# Altium PCB Stick2.PcbDoc
Units mil, origin at the board's own origin, x right, y up, seen from the top; angles counter-clockwise.
Board outline 2893.7 x 275.59 mil, 2 copper layers (Top Layer, Bottom Layer); 20 components, 30 nets, 66 pads, 22 vias.
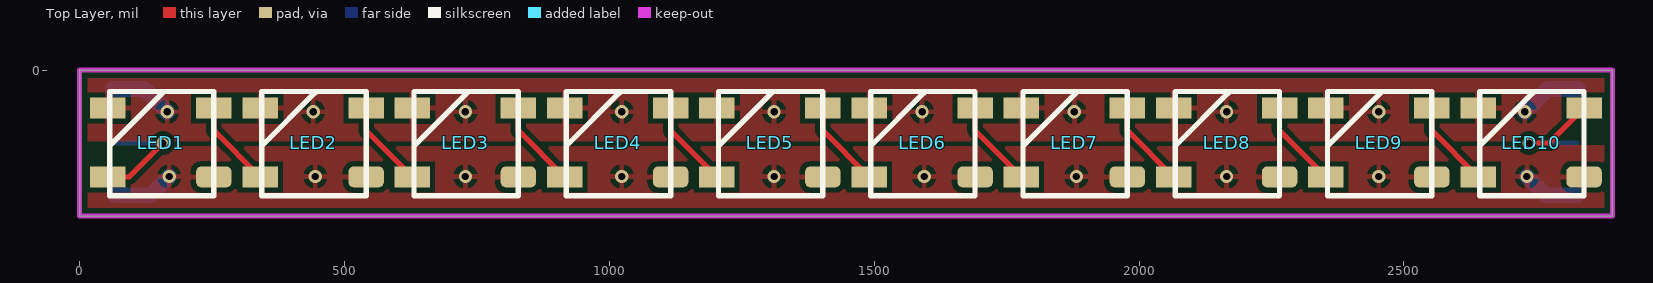
[diagram p0: Top Layer view]
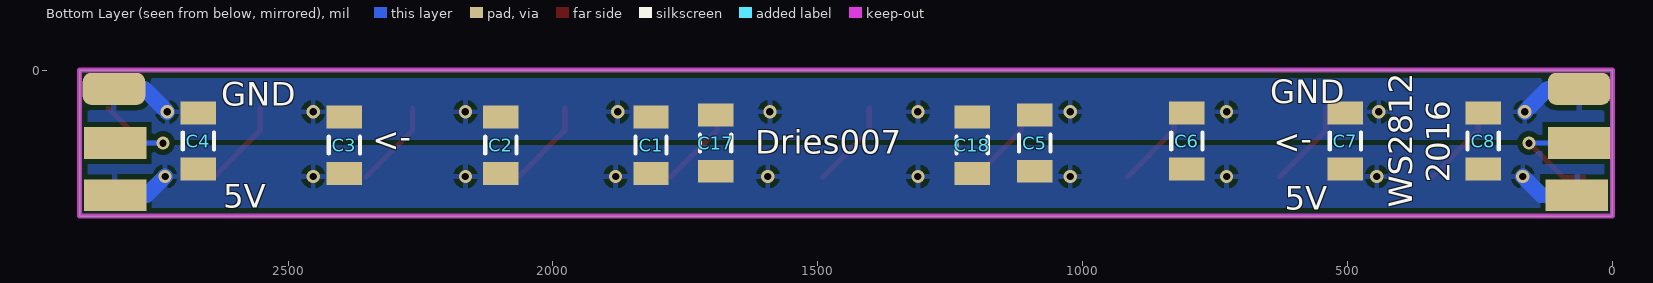
[diagram p1: Bottom Layer view, seen from below]

## Layer stack, top to bottom
Top Solder: solder mask 0.4, Solder Resist, Dk 3.5
Top Layer: signal copper 1.4
Dielectric 1: dielectric 12.6, FR-4, Dk 4.8
Bottom Layer: signal copper 1.4
Bottom Solder: solder mask 0.4, Solder Resist, Dk 3.5

## Board outline
0,-275.59 0,0 2893.7,0 2893.7,-275.59

## Design rules (kind name [scope] priority, off if disabled: settings)
Clearance [All] p1: gap=10
PolygonConnect [All] p1: connectstyle=Relief reliefconductorwidth=10 reliefentries=4 polygonreliefangle="90 Angle" airgapwidth=10
RoutingVias [All] p1: holewidth=28 width=50 viastyle="Through Hole" minholewidth=14 minwidth=25 maxholewidth=28 maxwidth=50
SolderMaskExpansion [All] p1: expansion=4
Width [All] p1: maxlimit=60 minlimit=10 preferedwidth=10
30 further rules are at their usual default settings.

## Classes and differential pairs
component class Stick: C1 C2 C3 C4 C5 C6 C7 C8 LED1 LED2 LED3 LED4 LED5 LED6 LED7 LED8
component class Rect: C17 C18 LED9 LED10

## Components (designator, comment, footprint, x,y, rotation, side; value= is the part's Value field where it differs from the comment)
C1 "" C1206 1814.96,-141.73 r270 bottom
C2 "" C1206 2098.43,-141.73 r270 bottom
C3 "" C1206 2393.7,-141.73 r270 bottom
C4 "" C1206 2669.29,-133.86 r270 bottom
C5 "" C1206 1090.55,-137.8 r270 bottom
C6 "" C1206 803.15,-133.86 r270 bottom
C7 "" C1206 503.94,-133.86 r270 bottom
C8 "" C1206 244.09,-133.86 r270 bottom
C17 "" C1206 1692.91,-137.8 r270 bottom
C18 "" C1206 1208.66,-141.73 r270 bottom
LED1 "WS2812B" WS2812B 153.54,-141.73 r180 top
LED2 "WS2812B" WS2812B 440.94,-141.73 r180 top
LED3 "WS2812B" WS2812B 728.35,-141.73 r180 top
LED4 "WS2812B" WS2812B 1015.75,-141.73 r180 top
LED5 "WS2812B" WS2812B 1303.15,-141.73 r180 top
LED6 "WS2812B" WS2812B 1590.55,-141.73 r180 top
LED7 "WS2812B" WS2812B 1877.95,-141.73 r180 top
LED8 "WS2812B" WS2812B 2165.35,-141.73 r180 top
LED9 "WS2812B" WS2812B 2452.76,-141.73 r180 top
LED10 "WS2812B" WS2812B 2740.16,-141.73 r180 top

## Footprints (in the part's own frame and the unit in brackets; to place one, negate y for a bottom-side part, rotate by r counter-clockwise, add the part's x,y. Pads: shape width x height; smd on the part's side, far side on the other; paste and mask are expansions set on the pad)
C1206 [mm] "Chip Capacitor, Body 3.2x1.6mm, IPC High Density"
  rect 1.1x1.7 smd: 1(-1.35,0) 2(1.35,0)
  silkscreen extent -0.4,-0.75 0.4,0.75, body extent -1.7,-0.9 1.7,0.9, height 1.3
WS2812B [mm]
  rrect50% 1.7x1 smd: 1(-2.54,1.524)
  rect 1.7x1 smd: 2(-2.54,-1.778) 3(2.54,-1.778) 4(2.54,1.524)
  silkscreen extent -2.54,-2.58 2.46,2.42

## Part data
C1 C2 C3 C4 C5 C6 C7 C8 C17 C18: library part Cap, "Capacitor"

## Free pads (board coordinates)
  rrect50% 118.11x60 smd far side: 0(62.99,-35.43) 0(2828.74,-35.43)
  rect 118.11x60 smd far side: 1(62.99,-137.8) 1(2826.77,-137.8) 2(66.93,-236.22) 2(2826.77,-236.22)

## Via types
v1: diameter 25, hole 14, Top Layer to Bottom Layer, tented both sides, 22 vias

## Nets (pads, with @x,y where several pads share a name; then routed paths per layer and width w, separated by ;. In a path a pad name is that pad's centre, name@x,y a point inside that pad or via, vN(x,y) a via of type N, cw(c..) or ccw(c..) an arc to the next point about the centre after c; other vN are vias at no path point)
DIN: LED1.4 pad.1@62.99,-137.8 | length 224.9
  Top Layer w10: LED1.4 93.54,-201.73 v1(157.48,-137.8)
  Bottom Layer w10: pad.1@62.99,-137.8 v1(157.48,-137.8)
DOUT: LED8.2 LED9.4 | length 166.2
  Top Layer w10: LED8.2 2265.35,-114.33 LED9.4
DOUT2: 
GND: C1.1 C2.1 C3.1 C4.1 C5.1 C6.1 C7.1 C8.1 C17.1 C18.1 LED1.3 LED2.3 LED3.3 LED4.3 LED5.3 LED6.3 LED7.3 LED8.3 LED9.3 LED10.3 pad.0 | length 238.6
  Bottom Layer w30: pad.0@62.99,-35.43 122.05,-35.43 v1(165.35,-78.74) ; v1(2728.35,-78.74) 2771.65,-35.43 pad.0@2828.74,-35.43
  other v1: 440.94,-78.74 728.35,-78.74 1023.62,-78.74 1311.02,-78.74 1590.55,-78.74 1877.95,-78.74 2165.35,-78.74 2452.76,-78.74
NetLED1_2: LED1.2 LED2.4 | length 166.2
  Top Layer w10: LED1.2 253.54,-114.33 LED2.4
NetLED2_2: LED2.2 LED3.4 | length 166.2
  Top Layer w10: LED2.2 540.94,-114.33 LED3.4
NetLED3_2: LED3.2 LED4.4 | length 166.2
  Top Layer w10: LED3.2 828.35,-114.33 LED4.4
NetLED4_2: LED4.2 LED5.4 | length 166.2
  Top Layer w10: LED4.2 1115.75,-114.33 LED5.4
NetLED5_2: LED5.2 LED6.4 | length 166.2
  Top Layer w10: LED5.2 1403.15,-114.33 LED6.4
NetLED6_2: LED6.2 LED7.4 | length 166.2
  Top Layer w10: LED6.2 1690.55,-114.33 LED7.4
NetLED7_2: LED7.2 LED8.4 | length 166.2
  Top Layer w10: LED7.2 1977.95,-114.33 LED8.4
NetLED9_2: LED9.2 LED10.4 | length 166.2
  Top Layer w10: LED9.2 2552.76,-114.33 LED10.4
NetLED10_2: LED10.2 pad.1@2826.77,-137.8 | length 221.9
  Top Layer w10: v1(2736.22,-137.8) 2774.09,-137.8 LED10.2
  Bottom Layer w10: v1(2736.22,-137.8) pad.1@2826.77,-137.8
NetLED11_2: 
NetLED12_2: 
NetLED13_2: 
NetLED14_2: 
NetLED15_2: 
NetLED16_2: 
NetLED17_2: 
NetLED18_2: 
NetLED19_2: 
NetLED20_2: 
NetLED21_2: 
NetLED22_2: 
NetLED23_2: 
NetLED24_2: 
NetLED25_2: 
NetLED26_2: 
VCC: C1.2 C2.2 C3.2 C4.2 C5.2 C6.2 C7.2 C8.2 C17.2 C18.2 LED1.1 LED2.1 LED3.1 LED4.1 LED5.1 LED6.1 LED7.1 LED8.1 LED9.1 LED10.1 pad.2 | length 226.2
  Bottom Layer w30: pad.2@66.93,-236.22 133.86,-236.22 v1(169.29,-200.79) ; v1(2732.28,-200.79) 2767.72,-236.22 pad.2@2826.77,-236.22
  other v1: 444.88,-200.79 728.35,-200.79 1023.62,-200.79 1311.02,-200.79 1594.49,-200.79 1881.89,-200.79 2165.35,-200.79 2452.76,-200.79

## Polygon pours and split planes (outlines as drawn)
VCC on Top Layer "VCC_L01_P002" (solid, remove dead copper, pour order 2): 0,-137.8 0,-275.59 2893.7,-275.59 2893.7,-137.8
GND on Top Layer "GND_L01_P000" (solid, remove dead copper, pour order 0): 0,0 0,-137.8 2893.7,-137.8 2893.7,0
GND on Bottom Layer "GND_L02_P006" (solid, remove dead copper, pour order 6): 0,0 0,-137.8 2893.7,-137.8 2893.7,0
VCC on Bottom Layer "VCC_L02_P004" (solid, remove dead copper, pour order 4): 0,-137.8 0,-275.59 2893.7,-275.59 2893.7,-137.8

## Keep-outs
Keep-Out Layer:
  the board outline again, w10

## Other copper
Top Layer:
  pour cut-out: 0,-141.73 0,-133.86 2893.7,-133.86 2893.7,-141.73
Bottom Layer:
  pour cut-out: 0,-141.73 0,-133.86 2893.7,-133.86 2893.7,-141.73

## Silkscreen, mask and mechanical layers (free items; w line width, h text height)
Bottom Overlay:
  text "GND" at 645.67,-62.99 h45
  text "GND" at 2625.98,-66.93 h45
  text "->" at 2267.72,-114.17 h45 r180
  text "->" at 566.93,-118.11 h45 r180
  text "Dries007" at 1618.11,-157.48 h45
  text "2016" at 307.09,-212.6 h45 r270
  text "WS2812" at 377.95,-259.84 h45 r270
  text "5V" at 2622.05,-259.84 h45
  text "5V" at 618.11,-263.78 h45
Mechanical 1:
  the board outline again, w10